# Altium PCB TSAL.PcbDoc
Units mil, origin at the board's own origin, x right, y up, seen from the top; angles counter-clockwise.
Board outline 3937.01 x 3149.61 mil, 2 copper layers (Top, Bottom); 27 components, 24 nets, 86 pads, 9 vias.
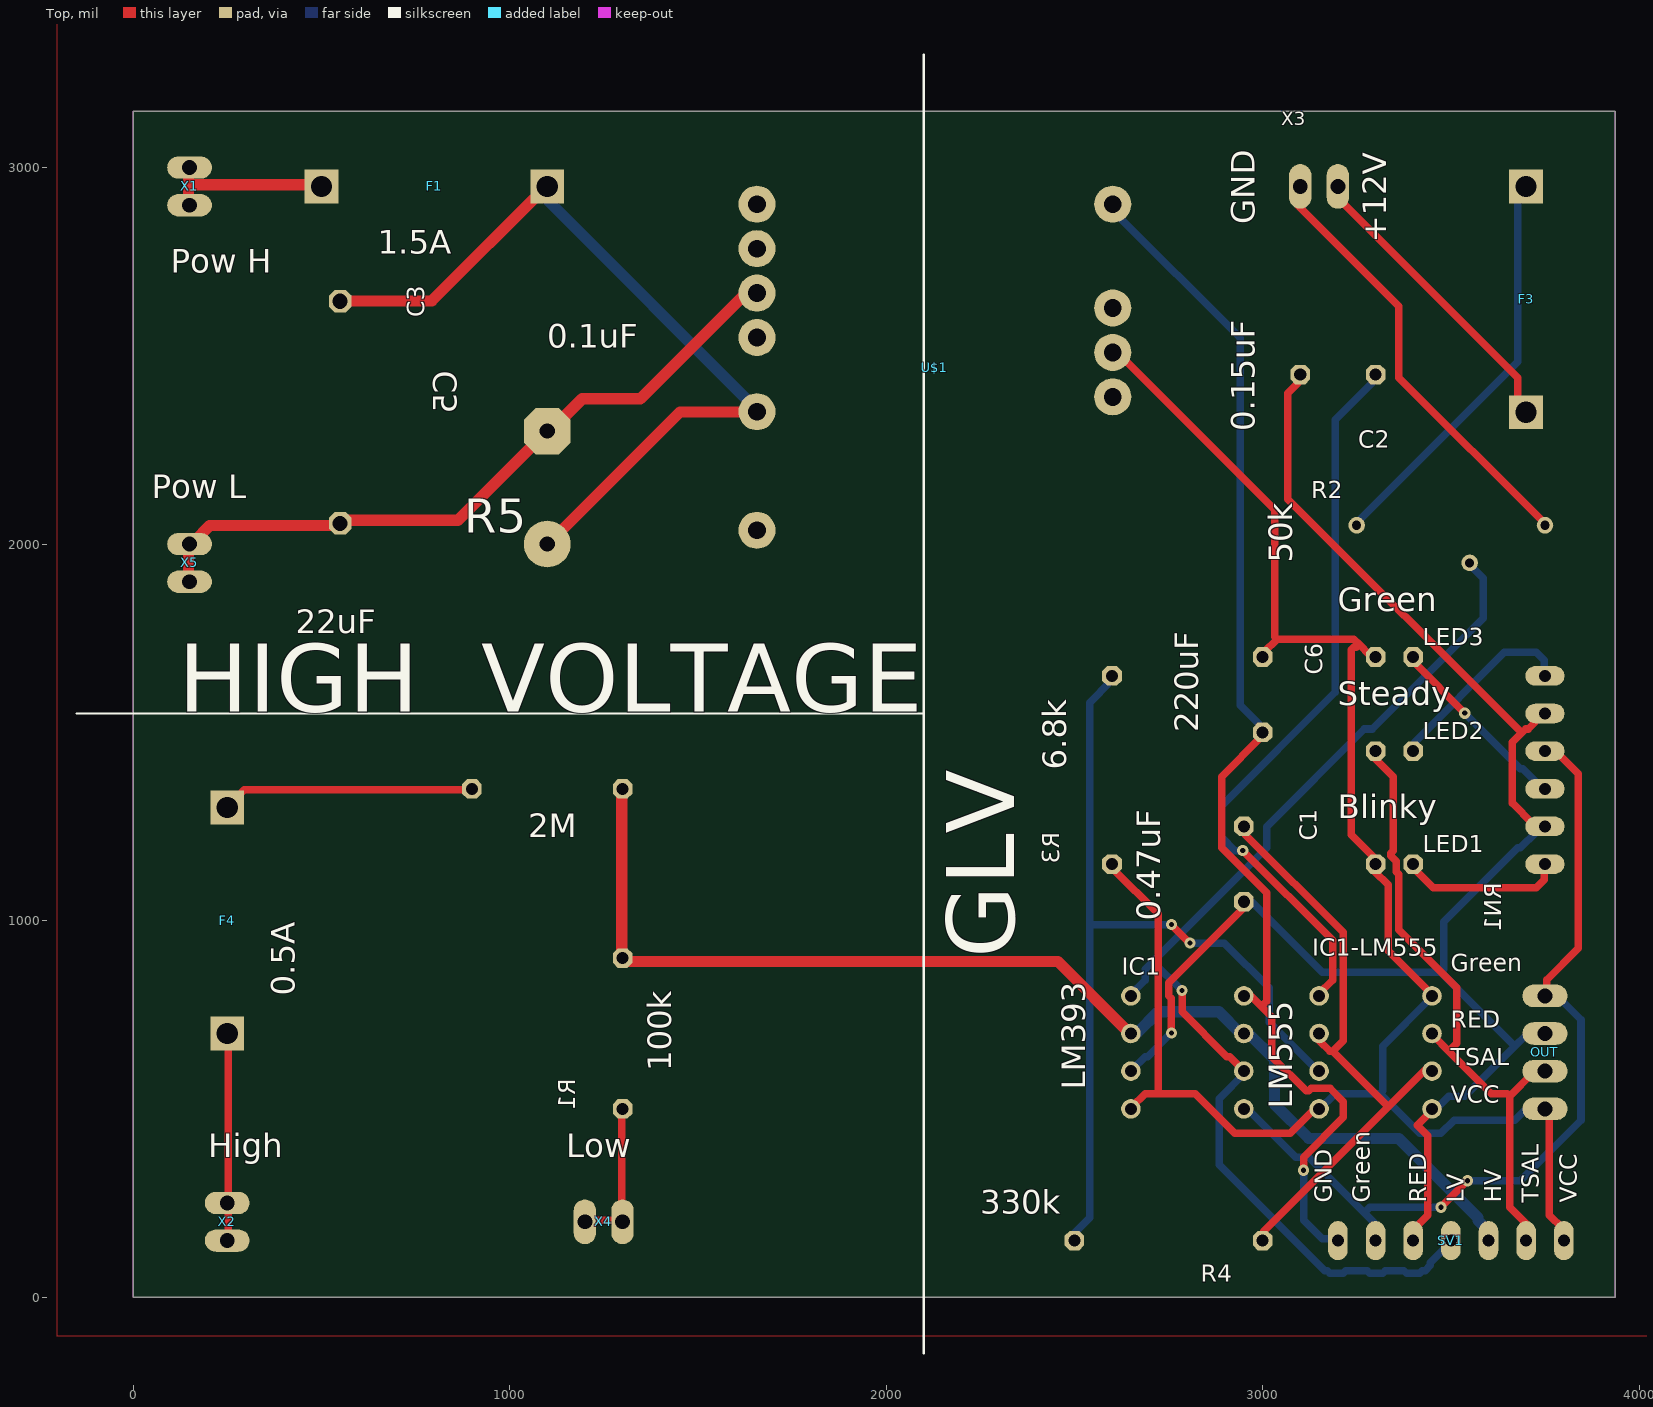
[diagram p0: Top view]
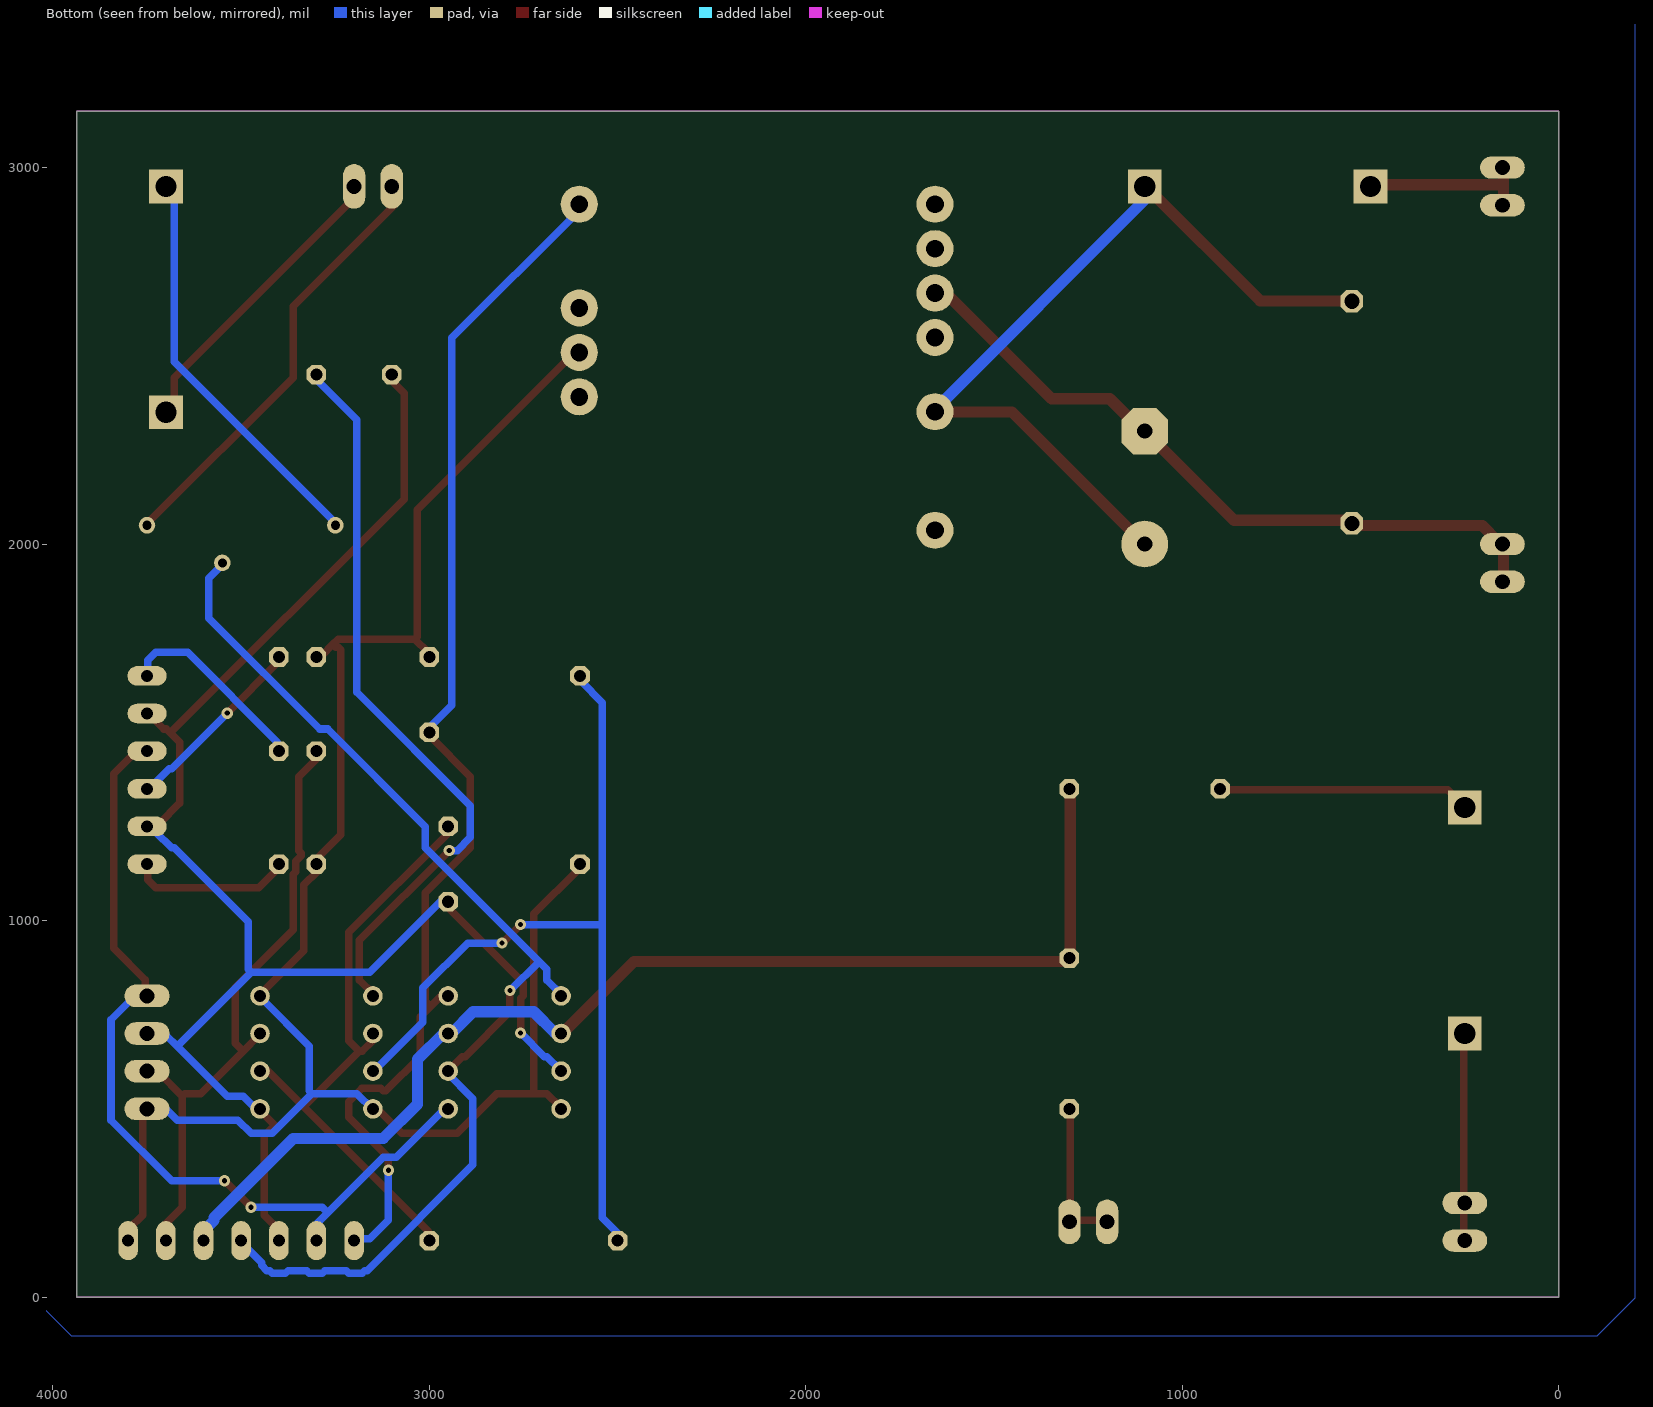
[diagram p1: Bottom view, seen from below]

## Layer stack, top to bottom
Top Solder: solder mask 0.4, Solder Resist, Dk 3.5
Top: signal copper 1.378
Dielectric 1: dielectric 12.6, FR-4, Dk 4.8
Bottom: signal copper 1.378
Bottom Solder: solder mask 0.4, Solder Resist, Dk 3.5

## Board outline
0,3149.61 0,0 3937.01,0 3937.01,3149.61

## Design rules (kind name [scope] priority, off if disabled: settings)
BoardOutlineClearance mdCopperDimension [All] p1: gap=10 ignorepadtopadclearanceinfootprint=FALSE except(0: Arc-SplitContinuation Track-SplitContinuation SMDPad-SplitContinuation THPad-SplitContinuation Via-SplitContinuation Fill-SplitContinuation Poly-SplitContinuation Region-SplitContinuation Text-SplitContinuation; 40: Poly-OutlineEdge Poly-CavityEdge Poly-CutoutEdge Poly-SplitBarrior)
Clearance "Clearance (Same Net)" [All] p1: gap=6 ignorepadtopadclearanceinfootprint=FALSE
Clearance "Clearance_for_NetClass_High Voltage" [InNetClass('High Voltage') vs InNetClass('High Voltage')] p2: gap=19.69 ignorepadtopadclearanceinfootprint=FALSE
Clearance [All] p3: gap=6 ignorepadtopadclearanceinfootprint=FALSE
HoleSize "HoleSize_For_NetClass_High Voltage" [InNetClass('High Voltage')] p1: absolutevalues=TRUE maxlimit=6.4 minlimit=6.4 maxpercent=80.000 minpercent=20.000
HoleSize [All] p2: absolutevalues=TRUE maxlimit=100000 minlimit=13.78 maxpercent=80.000 minpercent=20.000
HoleToHoleClearance mdDrill [All] p1: gap=6 allowstackedmicrovias=TRUE
MinimumSolderMaskSliver [All] p1 off: minsoldermaskwidth=10
PasteMaskExpansion mlMinCreamFrame [All] p1: expansion=0
PolygonConnect PolygonConnect_For_PolygonThermal_ON_Width60000_Gap100000 [InPolygonClass('PolygonThermal_ON_Width60000_Gap100000') vs Not IsVia] p1: connectstyle=Relief reliefconductorwidth=6 reliefentries=4 polygonreliefangle="90 Angle" airgapwidth=10
PolygonConnect ThermalVias [IsVia] p2: connectstyle=Direct reliefconductorwidth=10 reliefentries=4 polygonreliefangle="90 Angle" airgapwidth=10
PolygonConnect [All] p3: connectstyle=Relief reliefconductorwidth=10 reliefentries=4 polygonreliefangle="90 Angle" airgapwidth=10
RoutingVias [All] p1: holewidth=13.78 width=29.78 viastyle="Through Hole" minholewidth=13.78 minwidth=29.78 maxholewidth=100 maxwidth=100
SolderMaskExpansion mlMinStopFrame [All] p1: expansion=4 istentingtop=FALSE
Width "Width_For_NetClass_High Voltage" [InNetClass('High Voltage')] p1: maxlimit=60 minlimit=10 preferedwidth=30
Width [All] p2: maxlimit=10 minlimit=6 preferedwidth=6
26 further rules are at their usual default settings.

## Classes and differential pairs
polygon class PolygonThermal_ON_Width60000_Gap100000: Polygon_1_Net_N$8 Polygon_1_Net_N$9
net class "High Voltage": HV N$10 POW_H POW_L

## Components (designator, comment, footprint, x,y, rotation, side; value= is the part's Value field where it differs from the comment)
C1 "0.47u" C050-075X075 2950,1150 r270 top
C2 "0.15u" C050-075X075 3200,2450 r180 top
C3 "22uF" C150-091X182 550,2350 r270 top
C5 "0.1uF" E7,5-16 1100,2150 r90 top
C6 "220uF" C050-055X075 3000,1600 r270 top
F1 "FUSEBLANK_5X20MM" FUSE_HOLDER_5X20MM 500,2950 r0 top
F3 "FUSEBLANK_5X20MM" FUSE_HOLDER_5X20MM 3700,2350 r90 top
F4 "FUSEBLANK_5X20MM" FUSE_HOLDER_5X20MM 250,700 r90 top
IC1 "LM393N" DIL08 2800,650 r90 top
IC1-LM555 "LM555N" DIL08 3300,650 r90 top
LED1 "RED" LED3MM 3350,1150 r0 top
LED2 "RED" LED3MM 3350,1450 r0 top
LED3 "GREEN" LED3MM 3350,1700 r0 top
OUT "22-27-2041-04" 6410-04 3750,650 r270 top
R1 "100k" 0207/10 1300,700 r90 top
R2 "50k" RTRIM3006P 3550,2000 r0 top
R3 "6.8k" 0309/12 2600,1400 r90 top
R4 "330k" 0309/12 2750,150 r180 top
R5 "2M" 0207/10 1100,1350 r0 top
RN1 "470" SIL6 3750,1400 r90 top
SV1 "" FE07W 3500,150 r180 top
U$1 "" EPM1205SJ 2100,2450 r0 top
X1 "22-23-2021 - Power" 22-23-2021 150,2950 r90 top
X2 "22-23-2021 - Car Side" 22-23-2021 250,200 r90 top
X3 "22-23-2021 - Low Voltage" 22-23-2021 3150,2950 r0 top
X4 "22-23-2021 - Car Side" 22-23-2021 1250,200 r0 top
X5 "22-23-2021 - Power" 22-23-2021 150,1950 r90 top

## Footprints (in the part's own frame and the unit in brackets; to place one, negate y for a bottom-side part, rotate by r counter-clockwise, add the part's x,y. Pads: shape width x height; smd on the part's side, far side on the other; paste and mask are expansions set on the pad)
22-23-2021 [mm] "22-23-2021"
  oval 1.508x3.016 hole 1: 1(-1.27,0) 2(1.27,0)
  body extent -2.03,-1.51 2.03,1.51, height 1.27
0207/10 [mil] "0207/10"
  oct 52x52 / inner round 48.04 / far side oct 52x52 hole 32: 1(-200,0) 2(200,0)
  body extent -224,-24 224,24, height 150
0309/12 [mil] "0309/12"
  oct 52x52 / inner round 48.04 / far side oct 52x52 hole 32: 1(-250,0) 2(250,0)
  body extent -274,-24 274,24, height 150
6410-04 [mil] "6410-04"
  oval 60x120 hole 40: 1(150,0) 2(50,0) 3(-50,0) 4(-150,0)
  body extent -180,-60 180,60, height 150
C050-055X075 [mil] "C050-055X075"
  oct 52x52 / inner round 48.04 / far side oct 52x52 hole 32: 1(-100,0) 2(100,0)
  body extent -124,-24 124,24, height 50
C050-075X075 [mil] "C050-075X075"
  oct 52x52 / inner round 48.04 / far side oct 52x52 hole 32: 1(-100,0) 2(100,0)
  body extent -124,-24 124,24, height 50
C150-091X182 [mil] "C150-091X182"
  oct 60x60 / inner round 55.43 / far side oct 60x60 hole 40: 1(-295,0) 2(295,0)
  body extent -323,-28 323,28, height 50
DIL08 [mil] "DIL08"
  round 52 hole 32: 1(-150,-150) 2(-50,-150) 3(50,-150) 4(150,-150) 5(150,150) 6(50,150) 7(-50,150) 8(-150,150)
  body extent -176,-176 176,176, height 50
E7,5-16 [mil] "E7,5-16"
  round 124 hole 40: +(-150,0)
  oct 124x124 / inner round 114.56 / far side oct 124x124 hole 40: -(150,0)
  body extent -212,-62 208,62, height 50
EPM1205SJ [mil] "EPM1205SJ"
  round 98.43 hole 47.24: 4(501.97,-59.06) 5(501.97,59.06) 6(501.97,177.17) 7(501.97,452.76) 8(-442.91,452.76) 9(-442.91,334.65) 10(-442.91,216.54) 11(-442.91,98.43) 12(-442.91,-98.43) 14(-442.91,-413.39)
  body extent -581,-630 640,669, height 150
FE07W [mil] "FE07W"
  oval 52x104 hole 32: 1(-300,0) 2(-200,0) 3(-100,0) 4(0,0) 5(100,0) 6(200,0) 7(300,0)
  body extent -326,-52 326,52, height 150
FUSE_HOLDER_5X20MM [mil] "FUSE_HOLDER_5X20MM"
  rect 90x90 / inner round 83.15 / far side rect 90x90 hole 56: 1(0,0) 2(600,0)
  body extent -42,-42 642,42, height 50
LED3MM [mil] "LED3MM"
  oct 52x52 / inner round 48.04 / far side oct 52x52 hole 32: A(-50,0) K(50,0)
  body extent -85,-55 74,55, height 150
RTRIM3006P [mil] "RTRIM3006P"
  round 44 hole 24: 1(-300,50) 2(0,-50) 3(200,50)
  body extent -322,-72 222,72, height 50
SIL6 [mil] "SIL6"
  oval 52x104 hole 32: 1(-250,0) 2(-150,0) 3(-50,0) 4(50,0) 5(150,0) 6(250,0)
  body extent -283,-52 276,52, height 150

## Part data
C1 C2: library part C050-075X075, PackageName=C050-075X075
C3: library part C150-091X182, PackageName=C150-091X182
C5: library part E7,5-16, PackageName=E7,5-16
C6: library part C050-055X075, PackageName=C050-055X075
F1 F3 F4: library part FUSE_HOLDER_5X20MM, PackageName=FUSE_HOLDER_5X20MM
IC1 IC1-LM555: library part DIL08, PackageName=DIL08
LED1 LED2 LED3: library part LED3MM, PackageName=LED3MM
OUT: library part 6410-04, PackageName=6410-04
R1 R5: library part 0207/10, PackageName=0207/10
R2: library part RTRIM3006P, PackageName=RTRIM3006P
R3 R4: library part 0309/12, PackageName=0309/12
RN1: library part SIL6, PackageName=SIL6
SV1: library part FE07W, PackageName=FE07W
U$1: library part EPM1205SJ, PackageName=EPM1205SJ
X1 X2 X3 X4 X5: library part 22-23-2021, PackageName=22-23-2021

## Via types
v1: diameter 29.78/29.78 (per signal layer), hole 13.78, Top to Bottom, 9 vias

## Nets (pads, with @x,y where several pads share a name; then routed paths per layer and width w, separated by ;. In a path a pad name is that pad's centre, name@x,y a point inside that pad or via, vN(x,y) a via of type N, cw(c..) or ccw(c..) an arc to the next point about the centre after c; other vN are vias at no path point)
DIS: IC1-LM555.7 R3.2 R4.2 | length 2367.6
  Top w20: v1(2757.96,989.5) v1(2807.09,940.37)
  Bottom w20: R4.2 2498.31,154.39 2498.31,168.43 2540.41,210.53 2540.41,989.5 ; R3.2 2596.56,1649.16 2596.56,1635.13 2540.41,1578.99 2540.41,989.5 ; v1(2757.96,989.5) 2540.41,989.5 ; v1(2807.09,940.37) 2898.32,940.37 3017.62,821.07 3017.62,729.84 3143.94,603.52 IC1-LM555.7
GND: C6.2 IC1.4 SV1.7 U$1.7 | length 3315.8
  Top w20: IC1.4 2954.46,800.02 2968.49,800.02 2996.57,771.95 ; C6.2 2996.57,1494.77 2996.57,1487.76 2891.3,1382.49 2891.3,1193.01 3010.6,1073.71 3010.6,785.98 2996.57,771.95 ; v1(3108.85,336.85) 3108.85,371.94 3214.11,477.2 3214.11,519.31 3179.03,554.4 3129.9,554.4 3122.88,547.38 3115.87,547.38 3024.64,638.61 3024.64,743.88 2996.57,771.95
  Bottom w20: U$1.7 2603.57,2898.32 2603.57,2884.28 2940.42,2547.43 2940.42,1571.97 2996.57,1515.83 2996.57,1501.79 C6.2 ; v1(3108.85,336.85) 3108.85,203.51 3157.97,154.39 3193.06,154.39 SV1.7
GREEN: IC1.1 OUT.4 RN1.4 SV1.6 | length 2334.7
  Top w20: v1(3473.77,238.6) v1(3543.95,308.78) ; OUT.4 3754.48,800.02 3754.48,842.13 3838.69,926.34 3838.69,1389.51 3782.55,1445.65 3754.48,1445.65 RN1.4
  Bottom w20: IC1.1 2954.46,505.28 3087.8,371.94 3122.88,371.94 3270.26,224.57 ; SV1.6 3298.33,154.39 3298.33,196.5 3270.26,224.57 ; v1(3473.77,238.6) 3284.29,238.6 3270.26,224.57 ; v1(3543.95,308.78) 3684.3,308.78 3845.71,470.19 3845.71,736.86 3789.57,793 3754.48,793 OUT.4
HV: IC1.3 IC1.6 R1.2 R5.2 SV1.3 | length 3198.6
  Top w30: R5.2 1298.28,1347.4 1298.28,905.29 R1.2 1312.31,891.25 2456.2,891.25 2645.68,701.77 IC1.6
  Bottom w30: IC1.6 2652.7,701.77 2666.73,701.77 2722.87,757.91 2884.28,757.91 2940.42,701.77 2947.44,701.77 IC1.3 2961.48,701.77 3031.65,631.59 3031.65,512.29 3122.88,421.06 3361.49,421.06 3572.02,210.53 3572.02,203.51 3593.07,182.46 3593.07,154.39 SV1.3
LV: IC1.2 IC1.5 R2.2 SV1.4 | length 3036.4
  Top w20: v1(2786.03,814.06) 2786.03,757.91 2905.33,638.61 2912.35,638.61 2947.44,603.52 IC1.2
  Bottom w20: IC1.5 2645.68,800.02 2687.79,842.13 2687.79,870.2 2708.84,891.25 ; v1(2786.03,814.06) 2708.84,891.25 ; IC1.2 2954.46,596.51 2884.28,526.33 2884.28,350.89 3164.99,70.18 3172.01,70.18 3179.03,63.16 3214.11,63.16 3221.13,70.18 3277.27,70.18 3284.29,63.16 3319.38,63.16 3326.4,70.18 3375.52,70.18 3382.54,63.16 3417.63,63.16 3424.65,70.18 3431.66,70.18 3445.7,84.21 3445.7,91.23 3494.82,140.35 3494.82,147.37 SV1.4 ; R2.2 3550.96,1943.91 3586.05,1908.82 3586.05,1803.55 3291.31,1508.81 3270.26,1508.81 3010.6,1249.15 3010.6,1193.01 2708.84,891.25
N$2: R1.1 X4.1 X4.2 | length 405.3
  Top w20: X4.1 1200.03,203.51 1291.26,203.51 X4.2 1298.28,203.51 1298.28,498.26 R1.1
N$3: F3.2 R2.1 | length 1086.2
  Bottom w20: R2.1 3256.22,2056.19 3256.22,2063.21 3677.28,2484.27 3677.28,2926.39 3698.34,2947.44 F3.2
N$4: R2.3 X3.1 | length 1183
  Top w20: X3.1 3101.83,2954.46 3094.81,2947.44 3094.81,2898.32 3361.49,2631.64 3361.49,2442.17 3747.46,2056.19 R2.3
N$5: F4.1 X2.1 X2.2 | length 553.2
  Top w20: X2.1 252.64,154.39 252.64,245.62 X2.2 252.64,252.64 252.64,694.75 F4.1
N$6: F3.1 X3.2 | length 807.4
  Top w20: X3.2 3200.08,2947.44 3200.08,2919.37 3677.28,2442.17 3677.28,2371.99 3698.34,2350.94 F3.1
N$7: LED3.K RN1.3 | length 503.6
  Top w20: LED3.K 3403.59,1698.29 3403.59,1684.25 v1(3536.93,1550.92)
  Bottom w20: v1(3536.93,1550.92) 3684.3,1403.54 3691.32,1403.54 3740.44,1354.42 3747.46,1354.42 RN1.3
N$8: 
N$9: 
N$10: F1.1 X1.1 X1.2 | length 457.2
  Top w30: X1.1 147.37,2905.33 147.37,2954.46 ; X1.2 147.37,2996.57 147.37,2954.46 ; F1.1 498.26,2954.46 147.37,2954.46
N$11: F4.2 R5.1 | length 672.1
  Top w20: F4.2 252.64,1305.3 294.74,1347.4 898.27,1347.4 R5.1
N$14: C2.1 IC1-LM555.5 | length 1969.5
  Top w20: v1(2947.44,1185.99) 3186.04,947.39 3186.04,842.13 3150.95,807.04 3150.95,800.02 IC1-LM555.5
  Bottom w20: v1(2947.44,1185.99) 2926.39,1185.99 2891.3,1221.08 2891.3,1305.3 3193.06,1607.06 3193.06,2329.88 3298.33,2435.15 3298.33,2449.18 C2.1
N$15: LED2.K RN1.6 | length 518.7
  Bottom w20: LED2.K 3403.59,1452.67 3403.59,1473.72 3642.19,1712.32 3726.41,1712.32 3747.46,1691.27 3747.46,1656.18 RN1.6
N$16: LED1.K RN1.1 | length 428.7
  Top w20: LED1.K 3403.59,1143.89 3403.59,1136.87 3452.72,1087.75 3726.41,1087.75 3747.46,1108.8 3747.46,1143.89 RN1.1
POW_H: C3.1 C5.+ F1.2 U$1.12 | length 2207
  Top w30: C3.1 554.4,2645.68 793,2645.68 1094.76,2947.44 F1.2 ; C5.+ 1101.78,2000.05 1452.67,2350.94 1656.18,2350.94 U$1.12
  Bottom w30: F1.2 1101.78,2947.44 1101.78,2912.35 1656.18,2357.95 U$1.12
POW_L: C3.2 C5.- U$1.10 X5.1 X5.2 | length 1893.8
  Top w30: X5.1 147.37,1901.8 147.37,1993.03 X5.2 161.41,2007.07 203.51,2049.17 547.38,2049.17 C3.2 561.42,2063.21 863.18,2063.21 1087.75,2287.78 C5.- 1101.78,2294.79 1193.01,2386.02 1347.4,2386.02 1621.09,2659.71 1656.18,2659.71 U$1.10
RED: C1.2 C2.2 IC1-LM555.1 IC1.7 OUT.3 RN1.2 RN1.5 SV1.5 | length 4375.6
  Top w20: v1(2757.96,701.77) 2757.96,793 2750.94,800.02 2750.94,835.11 2947.44,1031.6 2947.44,1045.64 C1.2 ; C2.2 3094.81,2449.18 3094.81,2428.13 3066.74,2400.06 3066.74,2119.35 3687.81,1498.28 ; SV1.5 3403.59,154.39 3403.59,182.46 3438.68,217.55 3438.68,428.08 3410.61,456.15 3452.72,498.26 IC1-LM555.1 ; RN1.2 3747.46,1256.17 3719.39,1256.17 3663.25,1312.31 3663.25,1473.72 3687.81,1498.28 ; RN1.5 3747.46,1550.92 3705.35,1508.81 3698.34,1508.81 3687.81,1498.28
  Bottom w20: IC1.7 2652.7,603.52 2687.79,638.61 2694.8,638.61 v1(2757.96,701.77) ; C1.2 2954.46,1052.66 2968.49,1052.66 3157.97,863.18 3473.77,863.18 ; IC1-LM555.1 3452.72,505.28 3466.75,505.28 3494.82,533.35 3536.93,533.35 3670.27,666.68 ; OUT.3 3747.46,694.75 3698.34,694.75 3670.27,666.68 ; RN1.2 3747.46,1249.15 3733.43,1235.12 3726.41,1235.12 3684.3,1193.01 3677.28,1193.01 3480.79,996.52 3480.79,870.2 3473.77,863.18 ; 3473.77,863.18 3670.27,666.68
TR_THR: C1.1 IC1-LM555.2 IC1-LM555.6 R4.1 | length 1646.4
  Top w20: C1.1 2954.46,1249.15 2954.46,1228.1 3214.11,968.44 3214.11,680.72 3186.04,652.65 ; R4.1 3003.58,154.39 3003.58,175.44 3333.42,505.28 ; IC1-LM555.6 3150.95,694.75 3150.95,680.72 3179.03,652.65 3186.04,652.65 ; IC1-LM555.2 3445.7,603.52 3431.66,603.52 3333.42,505.28 ; 3186.04,652.65 3333.42,505.28
TSAL_OUT: IC1-LM555.3 LED2.A OUT.2 SV1.2 | length 1701.4
  Top w20: LED2.A 3298.33,1445.65 3298.33,1431.61 3347.45,1382.49 3347.45,1185.99 3340.43,1178.98 3340.43,1171.96 3354.47,1157.92 3354.47,1129.85 3361.49,1122.83 3361.49,975.46 3515.88,821.07 3515.88,673.7 3494.82,652.65 ; IC1-LM555.3 3452.72,694.75 3494.82,652.65 ; SV1.2 3698.34,154.39 3698.34,196.5 3656.23,238.6 3656.23,533.35 ; OUT.2 3747.46,596.51 3719.39,596.51 3656.23,533.35 ; 3494.82,652.65 3607.11,540.36 3649.21,540.36 3656.23,533.35
VCC: C6.1 IC1-LM555.4 IC1-LM555.8 IC1.8 LED1.A LED3.A OUT.1 R3.1 SV1.1 U$1.5 | length 4968.9
  Top w20: R3.1 2603.57,1143.89 2603.57,1136.87 2722.87,1017.57 2722.87,540.36 ; U$1.5 2603.57,2505.32 2617.61,2505.32 3031.65,2091.28 3031.65,1754.43 3038.67,1747.41 ; IC1.8 2652.7,505.28 2687.79,540.36 2722.87,540.36 ; C6.1 3003.58,1705.31 3003.58,1712.32 3038.67,1747.41 ; IC1-LM555.8 3143.94,505.28 3073.76,435.1 2926.39,435.1 2821.12,540.36 2722.87,540.36 ; LED3.A 3298.33,1705.31 3284.29,1705.31 3256.22,1733.38 ; IC1-LM555.4 3452.72,800.02 3333.42,919.32 3333.42,1094.76 3298.33,1129.85 3298.33,1143.89 LED1.A 3305.34,1157.92 3235.17,1228.1 3235.17,1719.34 3242.19,1726.36 3249.2,1726.36 3256.22,1733.38 ; OUT.1 3754.48,498.26 3761.5,491.24 3761.5,217.55 3796.58,182.46 3796.58,154.39 SV1.1 ; 3038.67,1747.41 3242.19,1747.41 3256.22,1733.38
  Bottom w20: IC1-LM555.8 3150.95,498.26 3193.06,540.36 3312.36,540.36 ; IC1-LM555.4 3445.7,793 3319.38,666.68 3319.38,547.38 3312.36,540.36 ; OUT.1 3747.46,498.26 3698.34,498.26 3670.27,470.19 3508.86,470.19 3473.77,435.1 3417.63,435.1 3312.36,540.36
pads on no net: U$1.4 U$1.6 U$1.8 U$1.9 U$1.11 U$1.14

## Polygon pours and split planes (outlines as drawn)
N$8 on Top "Polygon_1_Net_N$8" (solid, remove dead copper, pour order 1): -203,3453 -203,-103 4051.24,-103 4102.12,-52.12 4203,48.76 4203,3403 -98.76,3403 -148.76,3453
N$9 on Bottom "Polygon_1_Net_N$9" (solid, remove dead copper, pour order 0): -203,3403 4203,3403 4203,148.76 3951.24,-103 -101.24,-103 -203,-1.24

## Keep-outs
Keep-Out Layer:
  the board outline again, w0

## Silkscreen, mask and mechanical layers (free items; w line width, h text height)
Top Overlay:
  lines w6: -150,1550 2100,1550 ; 2100,-150 2100,1550 ; 2100,3300 2100,1550
  text "GND" at 3000,2850 h108.5 r90
  text "+12V" at 3350,2800 h108.5 r90
  text "1.5A" at 650,2750 h108.5
  text "Pow H" at 100,2700 h108.5
  text "0.1uF" at 1100,2500 h108.5
  text "0.15uF" at 3000,2300 h108.5 r90
  text "Pow L" at 50,2100 h108.5
  text "50k" at 3100,1950 h108.5 r90
  text "Green" at 3200,1800 h108.5
  text "22uF" at 432.23,1741.51 h108.5
  text "Steady" at 3200,1550 h108.5
  text "220uF" at 2850,1500 h108.5 r90
  text "HIGH" at 120.26,1494.5 h310
  text "VOLTAGE" at 924.85,1494.5 h310
  text "6.8k" at 2500,1400 h108.5 r90
  text "Blinky" at 3200,1250 h108.5
  text "2M" at 1050,1200 h108.5
  text "0.47uF" at 2750,1000 h108.5 r90
  text "GLV" at 2400,900 h310 r90
  text "Green" at 3500,850 h77.5
  text "0.5A" at 450,800 h108.5 r90
  text "RED" at 3500,700 h77.5
  text "100k" at 1450,600 h108.5 r90
  text "TSAL" at 3500,600 h77.5
  text "LM393" at 2550,550 h108.5 r90
  text "LM555" at 3100,500 h108.5 r90
  text "VCC" at 3500,500 h77.5
  text "High" at 200,350 h108.5
  text "Low" at 1150,350 h108.5
  text "GND" at 3200,250 h77.5 r90
  text "Green" at 3300,250 h77.5 r90
  text "RED" at 3450,250 h77.5 r90
  text "LV" at 3550,250 h77.5 r90
  text "HV" at 3650,250 h77.5 r90
  text "TSAL" at 3750,250 h77.5 r90
  text "VCC" at 3850,250 h77.5 r90
  text "330k" at 2250,200 h108.5
Dimension:
  the board outline again, w0

## Dimensions
3937.01,3149.61 to 3950,0 on tFinish
0,3149.61 to 3937.01,3149.61 on tFinish
900,1400 to 900,1950 on tFinish
150,2850 to 150,2050 on tFinish
250,700 to 250,300 on tFinish
250,1850 to 250,1400 on tFinish
1300,1300 to 1300,900 on tFinish
350,200 to 1150,200 on tFinish
1350,200 to 2500,200 on tFinish

## Text inside footprints (layer, text, board x,y; h text height)
OUT: tPlace "4" at 3722.94,896.06 h77.5 r270; tPlace "1" at 3720.94,426.06 h77.5 r270
RN1: tPlace "1" at 3770,1060 h60.45 r90
SV1: tPlace "6" at 3275,50 h77.5 r270; tPlace "5" at 3375,50 h77.5 r270; tPlace "4" at 3475,50 h77.5 r270; tPlace "3" at 3575,50 h77.5 r270; tPlace "7" at 3175,50 h77.5 r270; tPlace "2" at 3675,50 h77.5 r270